# Altium PCB line sensor.PcbDoc
Units mm, origin at the board's own origin, x right, y up, seen from the top; angles counter-clockwise.
Board outline 33.83 x 44.62 mm, 2 copper layers (Top Layer, Bottom Layer); 11 components, 0 nets, 23 pads, 0 vias.
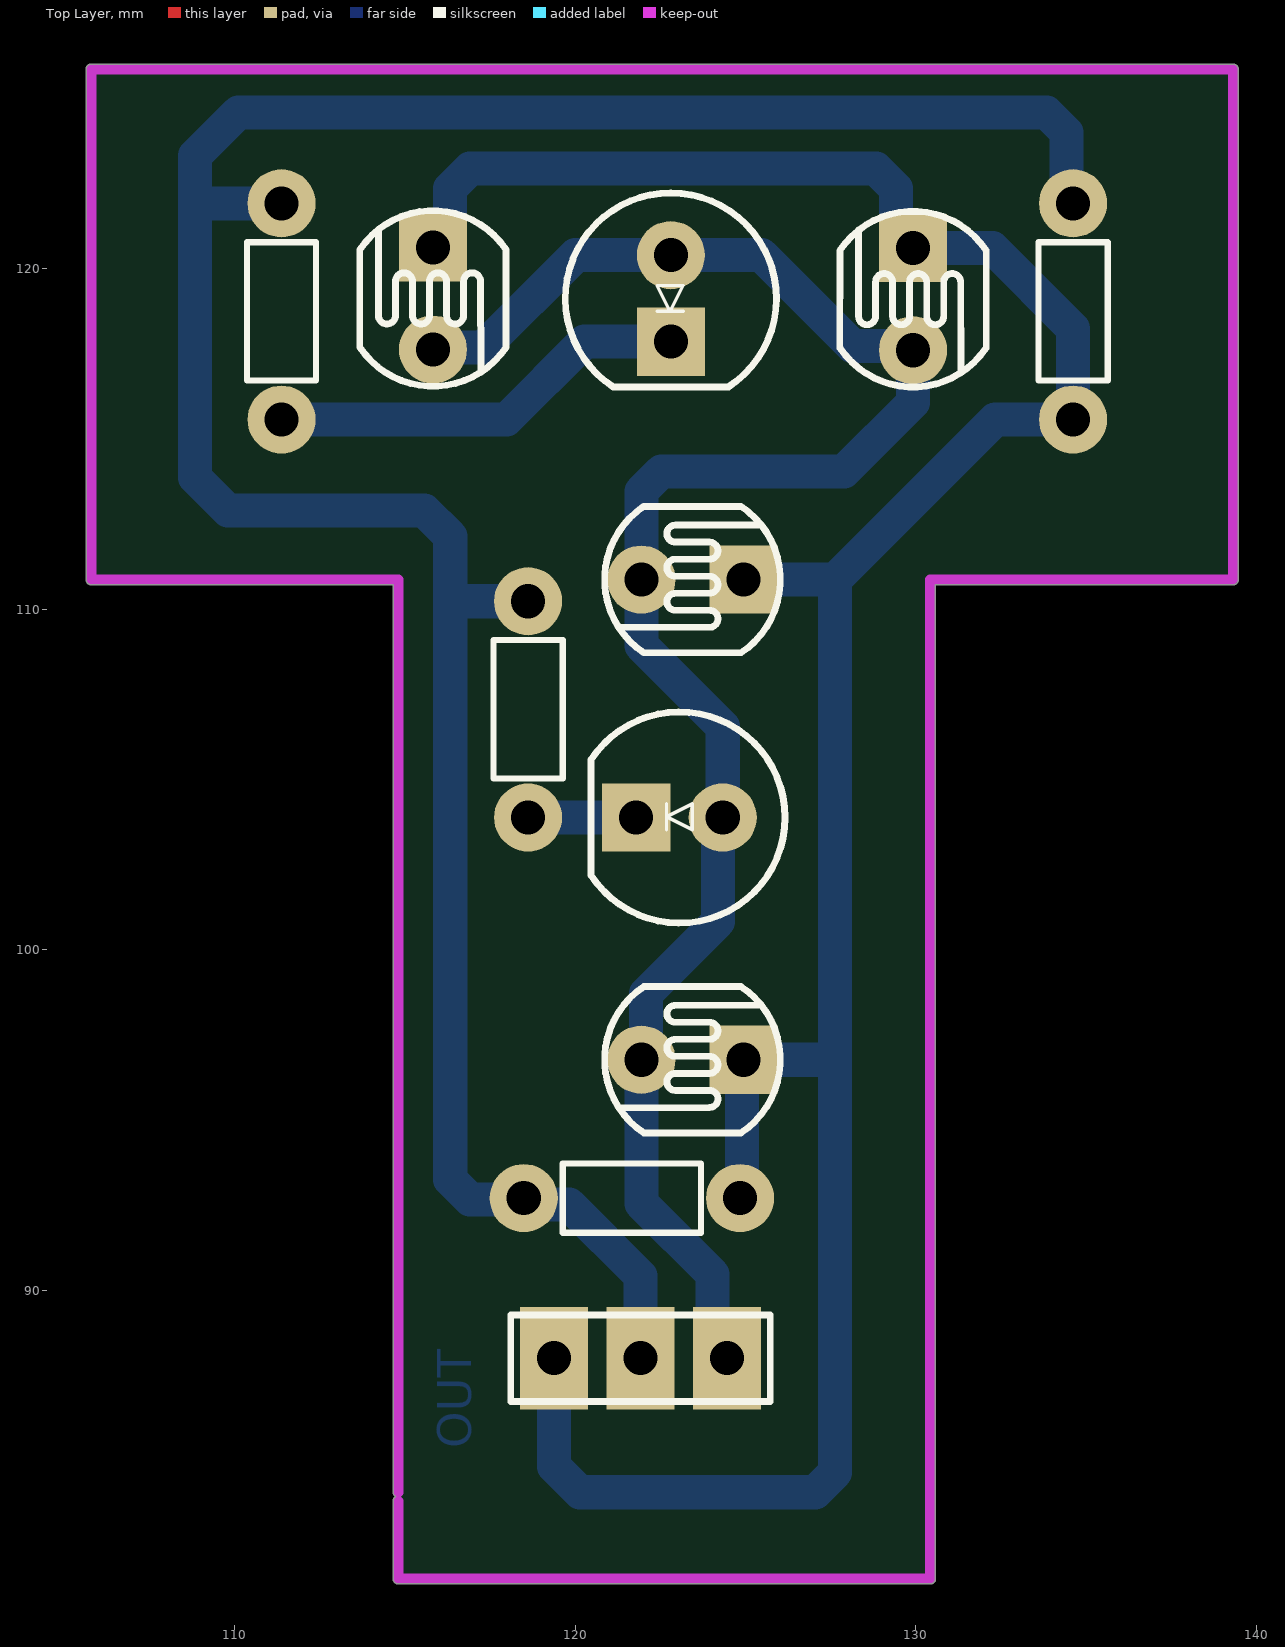
[diagram p0: Top Layer view]
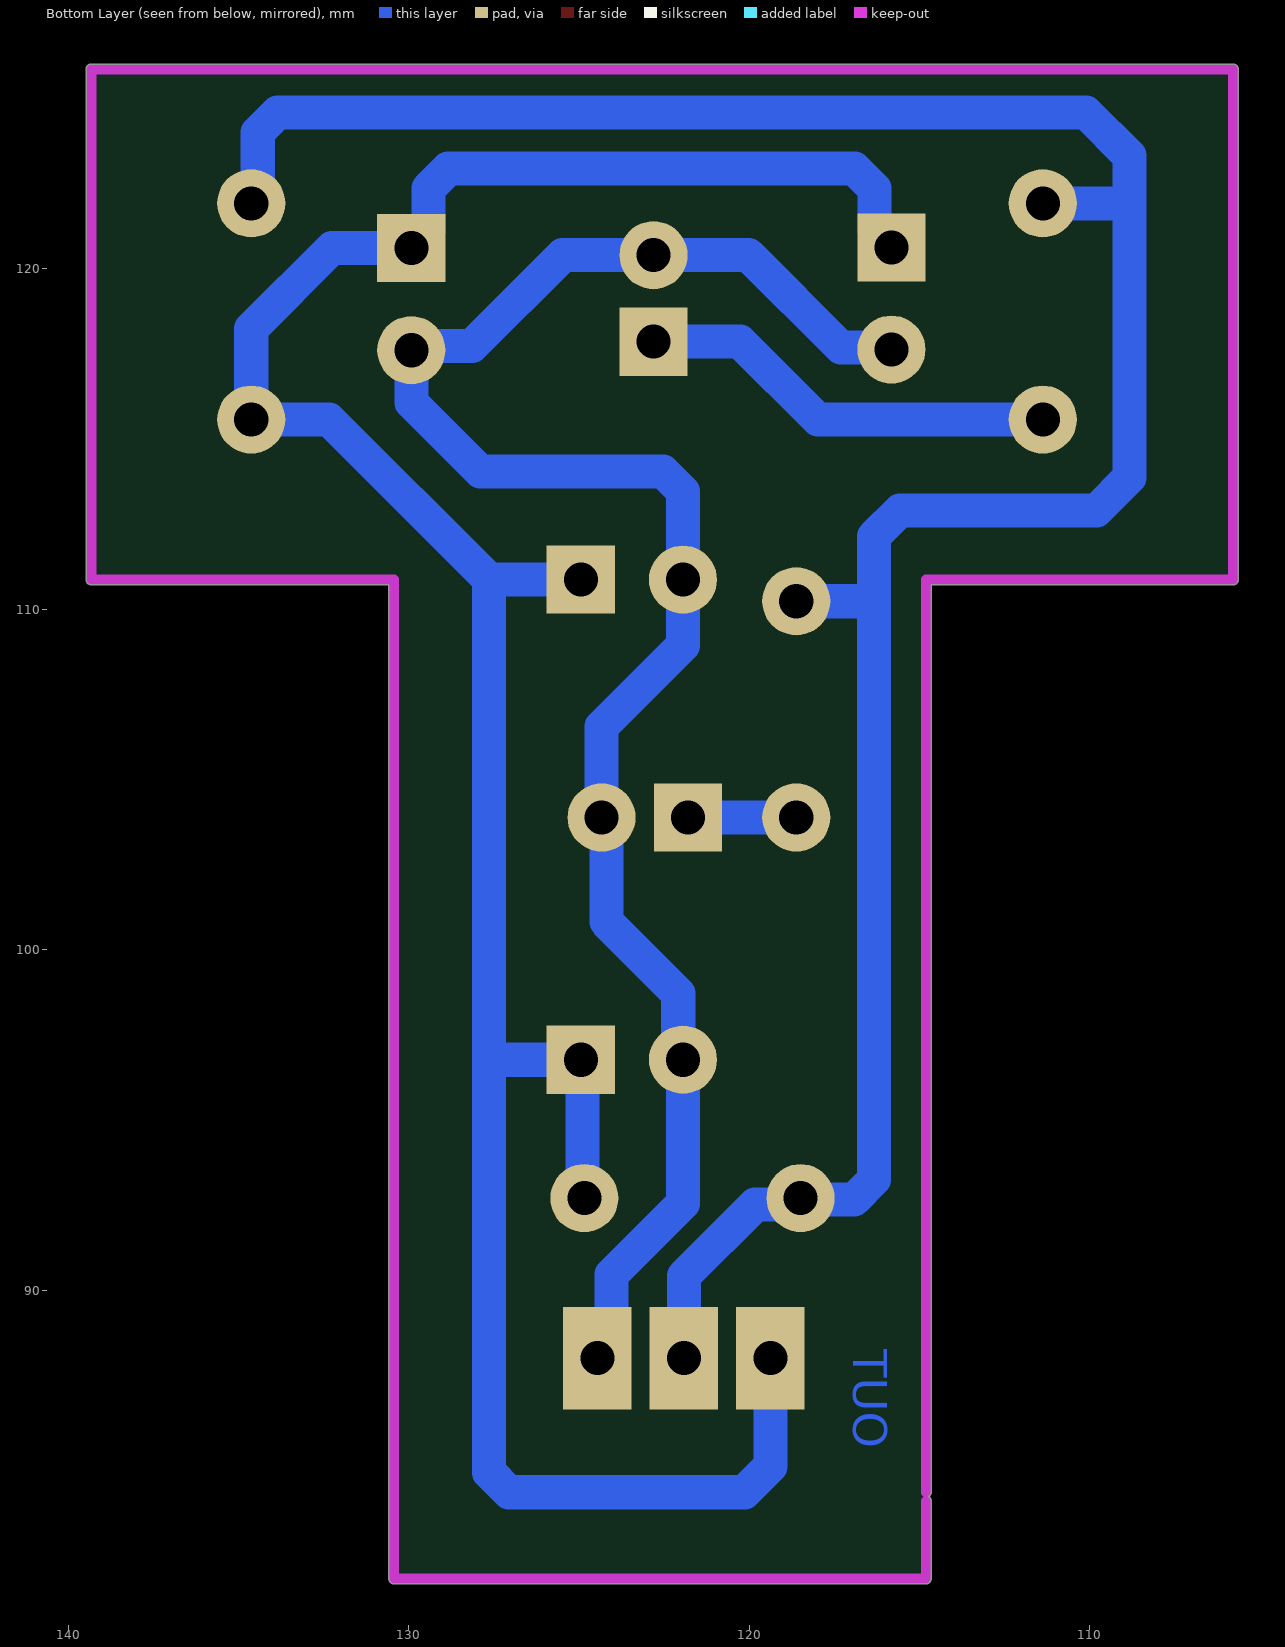
[diagram p1: Bottom Layer view, seen from below]

## Layer stack, top to bottom
Top Solder: solder mask 0.0102, Solder Resist, Dk 3.5
Top Layer: signal copper 0.0356
Dielectric 1: dielectric 0.32, FR-4, Dk 4.8
Bottom Layer: signal copper 0.0356
Bottom Solder: solder mask 0.0102, Solder Resist, Dk 3.5

## Board outline
114.658,84.074 114.658,110.721 105.791,110.721 cw(c105.791,110.871) 105.641,110.871 105.641,125.857 cw(c105.791,125.857) 105.791,126.007 139.319,126.007 cw(c139.319,125.857) 139.469,125.857 139.469,110.871 cw(c139.319,110.871) 139.319,110.721 130.579,110.721 130.579,81.534 cw(c130.429,81.534) 130.429,81.384 114.808,81.384 cw(c114.808,81.534) 114.658,81.534 114.658,83.82 cw(c114.808,83.82) 114.727,83.947 cw(c114.808,84.074)

## Design rules (kind name [scope] priority, off if disabled: settings)
Clearance [All] p1: gap=0.254 ignorepadtopadclearanceinfootprint=FALSE except(0: Arc-Hole Track-Hole SMDPad-Hole THPad-Hole Via-Hole Fill-Hole Poly-Hole Region-Hole Text-Hole)
PolygonConnect [All] p1: connectstyle=Relief reliefconductorwidth=0.254 reliefentries=4 polygonreliefangle="90 Angle" airgapwidth=0.254
RoutingVias [All] p1: holewidth=0.711 width=1.27 viastyle="Through Hole" minholewidth=0.711 minwidth=1.27 maxholewidth=0.711 maxwidth=1.27
SolderMaskExpansion [All] p1: expansion=0.102 istentingtop=FALSE
Width [All] p1: maxlimit=3 minlimit=0.254 preferedwidth=1
30 further rules are at their usual default settings.

## Components (designator, comment, footprint, x,y, rotation, side; value= is the part's Value field where it differs from the comment)
D1 "LED 5MM" LED5MM_BLUE 122.809,119.126 r270 top
D1 "LED 5MM" LED5MM_BLUE 123.063,103.886 r180 top
LDR1 "PhotoCell" PhotoCell 129.921,119.106 r90 top
LDR1 "PhotoCell" PhotoCell 123.444,96.774 r0 top
LDR3 "PhotoCell" PhotoCell 115.824,119.126 r90 top
LDR3 "PhotoCell" PhotoCell 123.444,110.871 r0 top
R1 "1K" RES-(1/4) 111.379,118.745 r270 top
R2 "1K" RES-(1/4) 134.62,118.745 r270 top
R2 "1K" RES-(1/4) 118.618,107.061 r90 top
R2 "1K" RES-(1/4) 121.666,92.71 r180 top
? "Comment" HDR1X3 124.46,88.011 r180 top

## Footprints (in the part's own frame and the unit in brackets; to place one, negate y for a bottom-side part, rotate by r counter-clockwise, add the part's x,y. Pads: shape width x height; smd on the part's side, far side on the other; paste and mask are expansions set on the pad)
HDR1X3 [mm] "Connector; Header; 3 Position"
  rect 2x3 hole 1: 1(0,0) 2(2.54,0) 3(5.08,0)
  silkscreen extent -1.27,-1.27 6.35,1.27, body extent -1.26,-1.27 6.36,1.27, height 8.38
LED5MM_BLUE [mm] "LED 5MM THROUGH HOLE BLUE-Designer Abbas Basereh"
  round 2 hole 1: 1(-1.27,0)
  rect 2x2 hole 1: 2(1.27,0)
  silkscreen extent -3.1,-3.1 2.6,3.1, body extent -2.99,-2.98 2.43,3.04, height 12.31
PhotoCell [mm]
  round 2 hole 1: 1(-1.5,0)
  rect 2x2 hole 1: 2(1.5,0)
  silkscreen extent -2.58,-2.15 2.58,2.15, body extent -2.61,-2.16 2.61,2.14, height 2.44
RES-(1/4) [mm]
  round 2 hole 1: 1(-3.175,0) 2(3.175,0)
  silkscreen extent -2.03,-1.02 2.03,1.02, body extent -3.43,-0.93 3.43,0.91, height 2.92

## Part data
D1 D1: "Light Emitting Diode", Data=16-12-2016, Designer="Abbas Basereh"
LDR1 LDR1 LDR3 LDR3: library part LDR, "Photo Cell- Variable Resistor With Light", Company="IPA CO.", Designer="Saeid Jorablo", Last Update Time=2008/07/17
R1 R2 R2 R2: library part "RES DIP PACKAGE", "TOTAL DIP RESISTOR PACK", Designer="Ali Hafizi"

## Nets (pads, with @x,y where several pads share a name; then routed paths per layer and width w, separated by ;. In a path a pad name is that pad's centre, name@x,y a point inside that pad or via, vN(x,y) a via of type N, cw(c..) or ccw(c..) an arc to the next point about the centre after c; other vN are vias at no path point)
pads on no net: ?.1 ?.2 ?.3 D1.1 D1.2 LDR1.1 LDR1.2 LDR3.1 LDR3.2 R1.1 R1.2 R2.1 R2.2
copper on no net: | length 234
  Bottom Layer w1: 111.379,115.57 117.983,115.57 120.269,117.856 122.809,117.856 ; 111.379,121.92 108.966,121.92 108.839,121.793 ; 115.824,117.626 115.881,117.683 117.302,117.683 120.015,120.396 122.809,120.396 125.476,120.396 128.135,117.737 129.79,117.737 129.921,117.606 129.917,117.602 129.917,116.074 127.889,114.046 122.53,114.046 121.944,113.46 121.944,110.871 121.944,108.942 124.333,106.553 124.333,103.886 124.194,103.747 124.194,100.826 122.082,98.714 122.082,96.912 121.944,96.774 121.944,92.559 124.038,90.465 124.038,87.544 124.165,87.417 ; 115.824,120.626 116.324,121.126 116.324,122.35 116.91,122.936 128.835,122.936 129.421,122.35 129.421,121.106 129.921,120.606 132.251,120.606 134.62,118.237 134.62,115.57 132.334,115.57 127.635,110.871 ; 118.618,103.886 121.793,103.886 121.367,104.312 ; 118.618,110.236 116.459,110.236 116.332,110.363 ; 119.38,88.265 119.38,88.011 119.38,84.836 120.142,84.074 127.049,84.074 127.635,84.66 127.635,96.901 ; 121.92,88.011 121.919,88.012 121.919,90.425 119.825,92.519 118.682,92.519 118.491,92.71 118.453,92.672 116.918,92.672 116.332,93.258 116.332,110.363 ; 124.841,92.71 124.892,92.761 124.892,96.722 124.944,96.774 127.508,96.774 127.635,96.901 ; 124.944,110.871 127.635,110.871 ; 134.62,121.92 134.429,122.111 134.429,124.001 133.843,124.587 110.109,124.587 108.839,123.317 108.839,121.793 ; 108.839,121.793 108.839,113.87 109.806,112.903 115.57,112.903 116.332,112.141 116.332,110.363 ; 127.635,96.901 127.635,110.871

## Keep-outs
Keep-Out Layer:
  lines w0.3: 114.808,83.82 114.808,81.534 130.429,81.534 130.429,110.871 139.319,110.871 139.319,125.857 105.791,125.857 105.791,110.871 114.808,110.871 114.808,84.074

## Other copper
Bottom Layer:
  text "OUT" at 116.948,85.363 h1 r90

## Dimensions
139.319,125.857 to 130.429,81.534 on Top Overlay
105.791,125.857 to 139.319,125.857 on Top Overlay
114.808,81.534 to 130.429,81.534 on Top Overlay